# EAGLE board SmartSensorWifi (EAGLE 6.5.0)
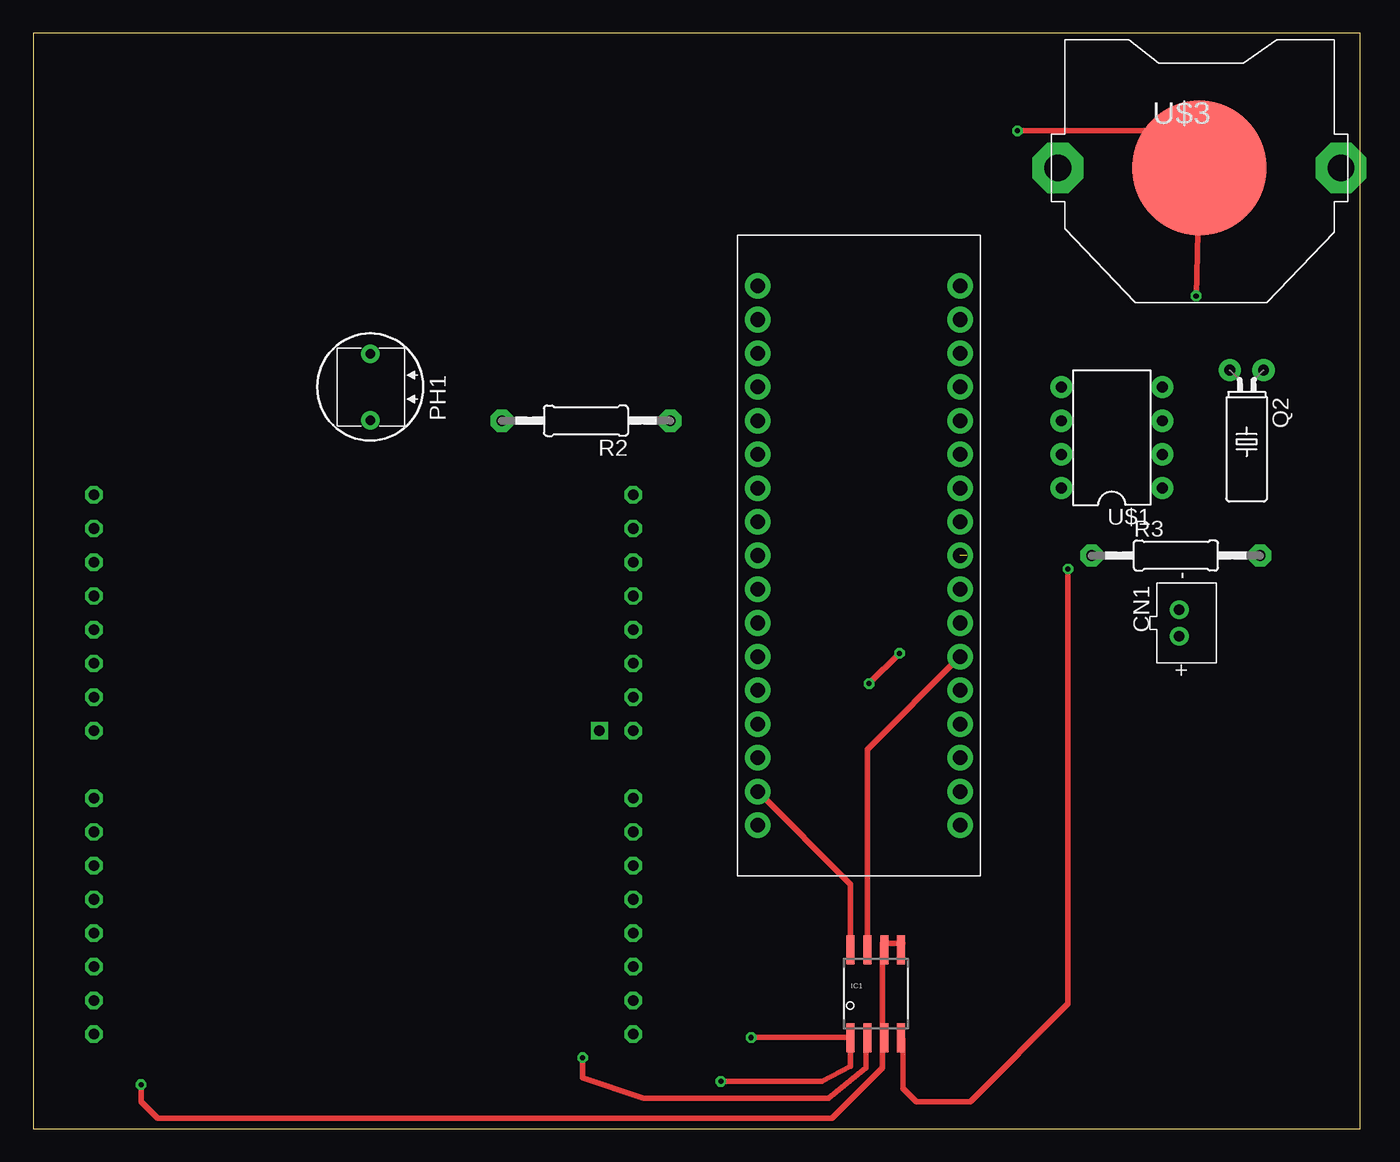
[diagram p0: board, top side]
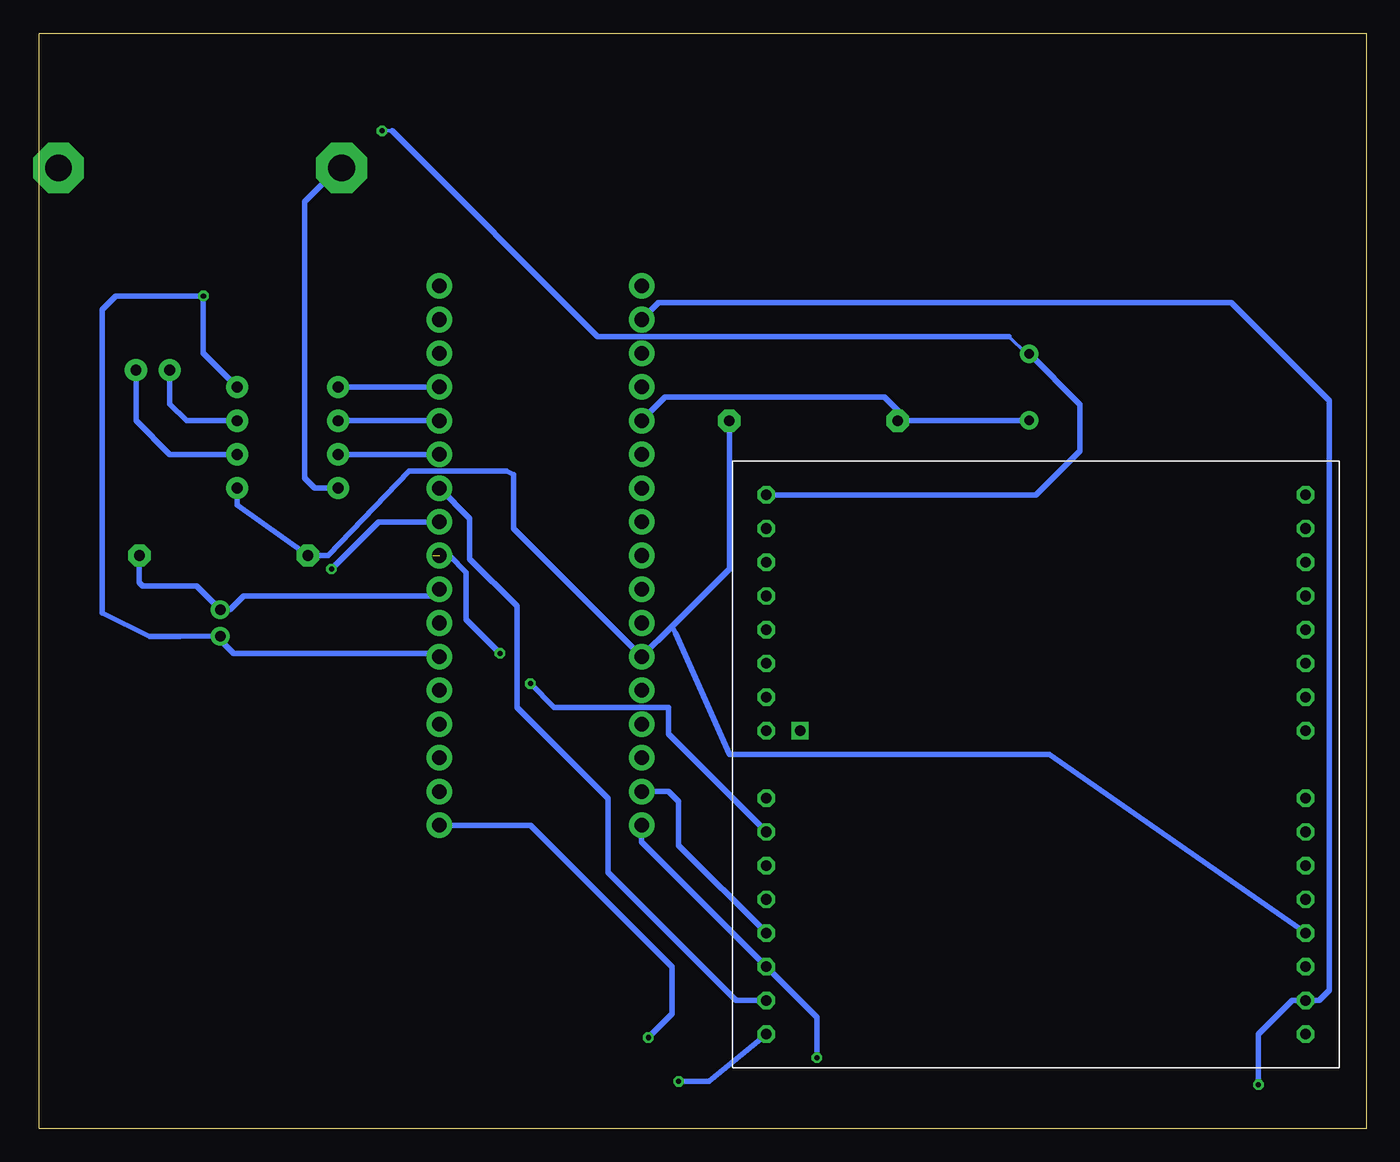
[diagram p1: board, bottom side, seen from below]

Size 100 x 82.54 mm. Coordinates in mm from the lower left corner, seen from the top.
Outline: 0,0 100,0 100,82.54 0,82.54 0,0
Copper layers (1*16): Top 0.035mm / dielectric 1.5mm / Bottom 0.035mm
Design rules "default": minimum track width 10mil, minimum drill 24mil, track to track 8mil, track to pad 8mil, pad to pad 8mil, via to via 8mil, smd to smd 8mil, copper to edge 40mil, drill to drill 8mil, minimum pad ring 10mil, minimum via ring 8mil, stop-mask expansion 4mil, vias tented up to drill 0mil, thermal gap 10mil

## Footprints (pad centres in the part's own frame; a part is rotated, then mirrored left to right if it is on the bottom)
JST-PH-2-THM = drill 0.8 pad 1.422: 1 1,0; 2 -1,0
SOIC8_208MIL = smd 0.6 x 2.2: 1 -1.905,-3.315; 2 -0.635,-3.315; 3 0.635,-3.315; 4 1.905,-3.315; 5 1.905,3.315; 6 0.635,3.315; 7 -0.635,3.315; 8 -1.905,3.315
D11XX = drill 0.7 pad 1.4: 1 -2.5,0; 2 2.5,0
TC38H = drill 0.813 pad 1.676: 1 -1.27,0; 2 1.27,0
0207/12 = drill 0.813 pad 1.676 octagon: 1 -6.35,0; 2 6.35,0
DIL08-ROUND = drill 0.813 pad 1.676: 1 -3.81,-3.81; 2 -1.27,-3.81; 3 1.27,-3.81; 4 3.81,-3.81; 5 3.81,3.81; 6 1.27,3.81; 7 -1.27,3.81; 8 -3.81,3.81
ARDUINOMICRO = drill 1.1 pad 1.93: P$1 -20.32,7.62; P$2 -17.78,7.62; P$3 -15.24,7.62; P$4 -12.7,7.62; P$5 -10.16,7.62; P$6 -7.62,7.62; P$7 -5.08,7.62; P$8 -2.54,7.62; P$9 0,7.62; P$10 2.54,7.62; P$11 5.08,7.62; P$12 12.7,-7.62; P$13 10.16,-7.62; P$14 12.7,7.62; P$15 15.24,7.62; P$16 17.78,7.62; P$17 20.32,7.62; P$18 20.32,-7.62; P$19 17.78,-7.62; P$20 15.24,-7.62; P$21 7.62,7.62; P$22 10.16,7.62; P$23 7.62,-7.62; P$24 5.08,-7.62; P$25 2.54,-7.62; P$26 0,-7.62; P$27 -2.54,-7.62; P$28 -5.08,-7.62; P$29 -7.62,-7.62; P$30 -10.16,-7.62; P$31 -12.7,-7.62; P$32 -15.24,-7.62; P$33 -17.78,-7.62; P$34 -20.32,-7.62
CR2032-THRU = drill 2 pad 3.81 octagon: +1 -10.668,0; +2 10.668,0 | smd 10.16 x 10.16: - 0,0
WIZFI210STACKABLE = drill 0.8 octagon: ADC1 38.1,3.81; ADC2 38.1,1.27; ALARM1 38.1,13.97; ALARM2 38.1,6.35; DC_DC_CNTL 38.1,8.89; EN1V8 78.74,-19.05; EXT_ANT 78.74,16.51; EXT_NRESET 78.74,-13.97; GND 38.1,16.51; GND3 78.74,-24.13; GND4 78.74,13.97; GPIO10 38.1,-6.35; GPIO19 38.1,-8.89; GPIO20 38.1,-11.43; GPIO21 38.1,-13.97; GPIO27 78.74,-11.43; GPIO28 78.74,11.43; GPIO29 78.74,8.89; GPIO30 78.74,6.35; GPIO31 78.74,3.81; SPI_CLK 38.1,-19.05; SPI_CS 38.1,-21.59; SPI_MISO 38.1,-16.51; SPI_MOSI 38.1,-24.13; UART0_CTS 78.74,1.27; UART0_RTS 78.74,-6.35; UART0_RX 78.74,-1.27; UART0_TX 78.74,-8.89; VBAT 38.1,11.43; VDDIO 78.74,-16.51; VIN3V3 78.74,-21.59; VOUT_1V8 38.1,-1.27 | drill 0.8 pad 0.508 square: GND2 40.64,-1.27

## Placement (x,y rotation side)
CN1  [JST-PH-2-THM]  86.36,38.1 270 top
IC1  AT45DB-S  [SOIC8_208MIL]  63.5,10.16 0 top
PH1  D1160_12  [D11XX]  25.4,55.88 90 top
Q2  [TC38H]  91.44,57.15 180 top
R2  220  [0207/12]  41.66,53.34 180 top
R3  [0207/12]  86.11,43.18 0 top
U$1  DS1302  [DIL08-ROUND]  81.28,52.07 90 top
U$2  ARDUINOMICRO  [ARDUINOMICRO]  62.23,43.18 270 top
U$3  [CR2032-THRU]  87.88,72.39 0 top
U$4  WIZFISTACKED  [WIZFI210STACKABLE]  83.31,31.24 0 bottom

## Library data of the parts
CN1 IC1 R2 R3 U$1-U$3 = adafruit
PH1 = photo-elements
Q2 = adafruit; OC_FARNELL: unknown; OC_NEWARK: unknown
U$4 = SmartSensorWifi

## Nets
3V3: IC1.3 U$2.P$33 U$4.VIN3V3
5V: R2.1 R3.1 U$1.1 U$2.P$23 U$4.VDDIO
A1: PH1.1 R2.2 U$2.P$30
CS_FLASH: IC1.4 U$2.P$8
CS_WIFI: U$2.P$7 U$4.SPI_CS
GND: CN1.1 IC1.7 U$1.4 U$2.P$21 U$3.-
GND2: U$4.GND2
GND3: U$4.GND3
GND4: U$4.GND4
MISO: IC1.8 U$2.P$19 U$4.SPI_MISO
MOSI: IC1.1 U$2.P$17 U$4.SPI_MOSI
N$1: U$1.5 U$2.P$4
N$2: Q2.2 U$1.3
N$3: Q2.1 U$1.2
N$4: U$1.7 U$2.P$6
N$5: U$1.6 U$2.P$5
N$10: U$1.8 U$3.+1
PSHBTN: CN1.2 R3.2 U$2.P$10
S$1: PH1.2 U$4.GND
SCK: IC1.2 U$2.P$18 U$4.SPI_CLK
VBAT: U$4.VBAT
VOUT_1V8: U$4.VOUT_1V8
WIFI_HOSTWAKEUP: U$2.P$9 U$4.GPIO19

## Tracks (layer width: path | path; a pad name or v marks a point on that pad's centre or on a via)
3V3  (via drill 0.38 pad 0.25)
  Top 0.254: IC1.3 64.01,6.72
  Top 0.406: 64.01,6.72 64.01,4.57 60.2,0.76 9.4,0.76 8.13,2.03 v8.13,3.3
  Bottom 0.406: U$2.P$33 53.34,62.23 10.16,62.23 2.79,54.86 2.79,10.41 3.56,9.65 U$4.VIN3V3 5.59,9.65 8.13,7.11 v8.13,3.3
5V
  Bottom 0.406: 52.32,37.85 U$2.P$23 64.26,45.21 64.26,49.28 64.77,49.53 72.14,49.53 78.23,43.18 R3.1 85.09,46.99 U$1.1 | 52.32,37.85 48.01,42.16 R2.1 | U$4.VDDIO 23.88,28.19 48.01,28.19 52.07,37.34 52.32,37.85
A1
  Top 0.254: 35.27,53.38 R2.2
  Bottom 0.254: PH1.1 25.44,53.34
  Bottom 0.406: 25.44,53.34 R2.2 35.31,54.1 36.32,55.12 52.83,55.12 U$2.P$30
CS_FLASH  (via drill 0.38 pad 0.25)
  Top 0.254: IC1.4 65.53,6.72
  Top 0.406: 65.53,6.72 65.53,3.05 66.55,2.03 70.61,2.03 77.98,9.4 v77.98,42.16
  Bottom 0.406: v77.98,42.16 74.42,45.72 U$2.P$8
CS_WIFI
  Bottom 0.406: U$2.P$7 67.56,45.97 67.56,42.93 64.01,39.37 64.01,31.75 57.15,24.89 57.15,19.3 47.5,9.65 U$4.SPI_CS
GND  (via drill 0.38 pad 0.25)
  Top 0.254: 83.31,72.39 U$3.-
  Top 0.406: U$2.P$21 62.87,28.57 IC1.7 | U$3.- v87.63,62.74
  Bottom 0.406: U$1.4 87.63,58.42 v87.63,62.74 94.23,62.74 95.25,61.72 95.25,38.86 91.69,37.08 89.41,37.08 CN1.1 86.36,36.83 85.34,35.81 70.1,35.81 U$2.P$21
MISO
  Top 0.406: U$2.P$19 61.59,18.41 IC1.8
  Bottom 0.406: U$4.SPI_MISO 51.82,21.34 51.82,24.64 52.58,25.4 U$2.P$19
MOSI  (via drill 0.38 pad 0.25)
  Top 0.406: v51.82,3.56 59.44,3.56 61.59,4.7 IC1.1 v54.1,6.86
  Bottom 0.406: U$4.SPI_MOSI 49.53,3.56 v51.82,3.56 | v54.1,6.86 52.32,8.64 52.32,12.19 62.99,22.86 U$2.P$17
N$1
  Bottom 0.406: U$2.P$4 U$1.5
N$2
  Bottom 0.406: U$1.3 88.9,53.34 90.17,54.61 Q2.2
N$3
  Bottom 0.406: U$1.2 90.17,50.8 92.71,53.34 Q2.1
N$4
  Bottom 0.406: U$2.P$6 U$1.7
N$5
  Bottom 0.406: U$2.P$5 U$1.6
N$10
  Bottom 0.406: U$1.8 79.25,48.26 80.01,49.02 80.01,69.85 77.47,72.39 U$3.+1
PSHBTN
  Bottom 0.406: U$2.P$10 70.36,40.13 84.58,40.13 85.61,39.1 CN1.2 88.15,40.89 92.2,40.89 92.46,41.15 R3.2
S$1  (via drill 0.38 pad 0.25)
  Top 0.406: v74.17,75.18 85.09,75.18 85.09,74.68
  Bottom 0.254: 25.61,58.38 26.92,59.69 | 73.41,75.18 v74.17,75.18
  Bottom 0.406: U$4.GND 24.89,47.75 21.59,51.05 21.59,54.57 PH1.2 25.61,58.38 | 26.92,59.69 57.91,59.69 73.41,75.18
S$2
  Top 0.254: 65.28,7.11 65.53,6.86
S$3
  Top 0.406: 65.53,13.97 64.01,13.97 64.01,6.1
SCK  (via drill 0.38 pad 0.25)
  Top 0.254: IC1.2 62.74,6.72
  Top 0.406: 62.74,6.72 62.74,4.57 59.94,2.29 45.97,2.29 41.4,3.81 v41.4,5.33
  Bottom 0.406: U$2.P$18 54.61,21.59 U$4.SPI_CLK 41.4,8.38 v41.4,5.33
WIFI_HOSTWAKEUP  (via drill 0.38 pad 0.25)  (1 unrouted)
  Top 0.406: v62.99,33.53 v65.28,35.81
  Bottom 0.406: U$4.GPIO19 52.58,29.72 52.58,31.75 61.21,31.75 v62.99,33.53 | v65.28,35.81 67.82,38.35 67.82,41.91 69.09,43.18 70.36,43.18